# Altium PCB GenRF_R00.PcbDoc
Units mil, origin at the board's own origin, x right, y up, seen from the top; angles counter-clockwise.
Board outline 2755.91 x 1771.65 mil, 2 copper layers (Top Layer, Bottom Layer); 48 components, 33 nets, 152 pads, 297 vias.
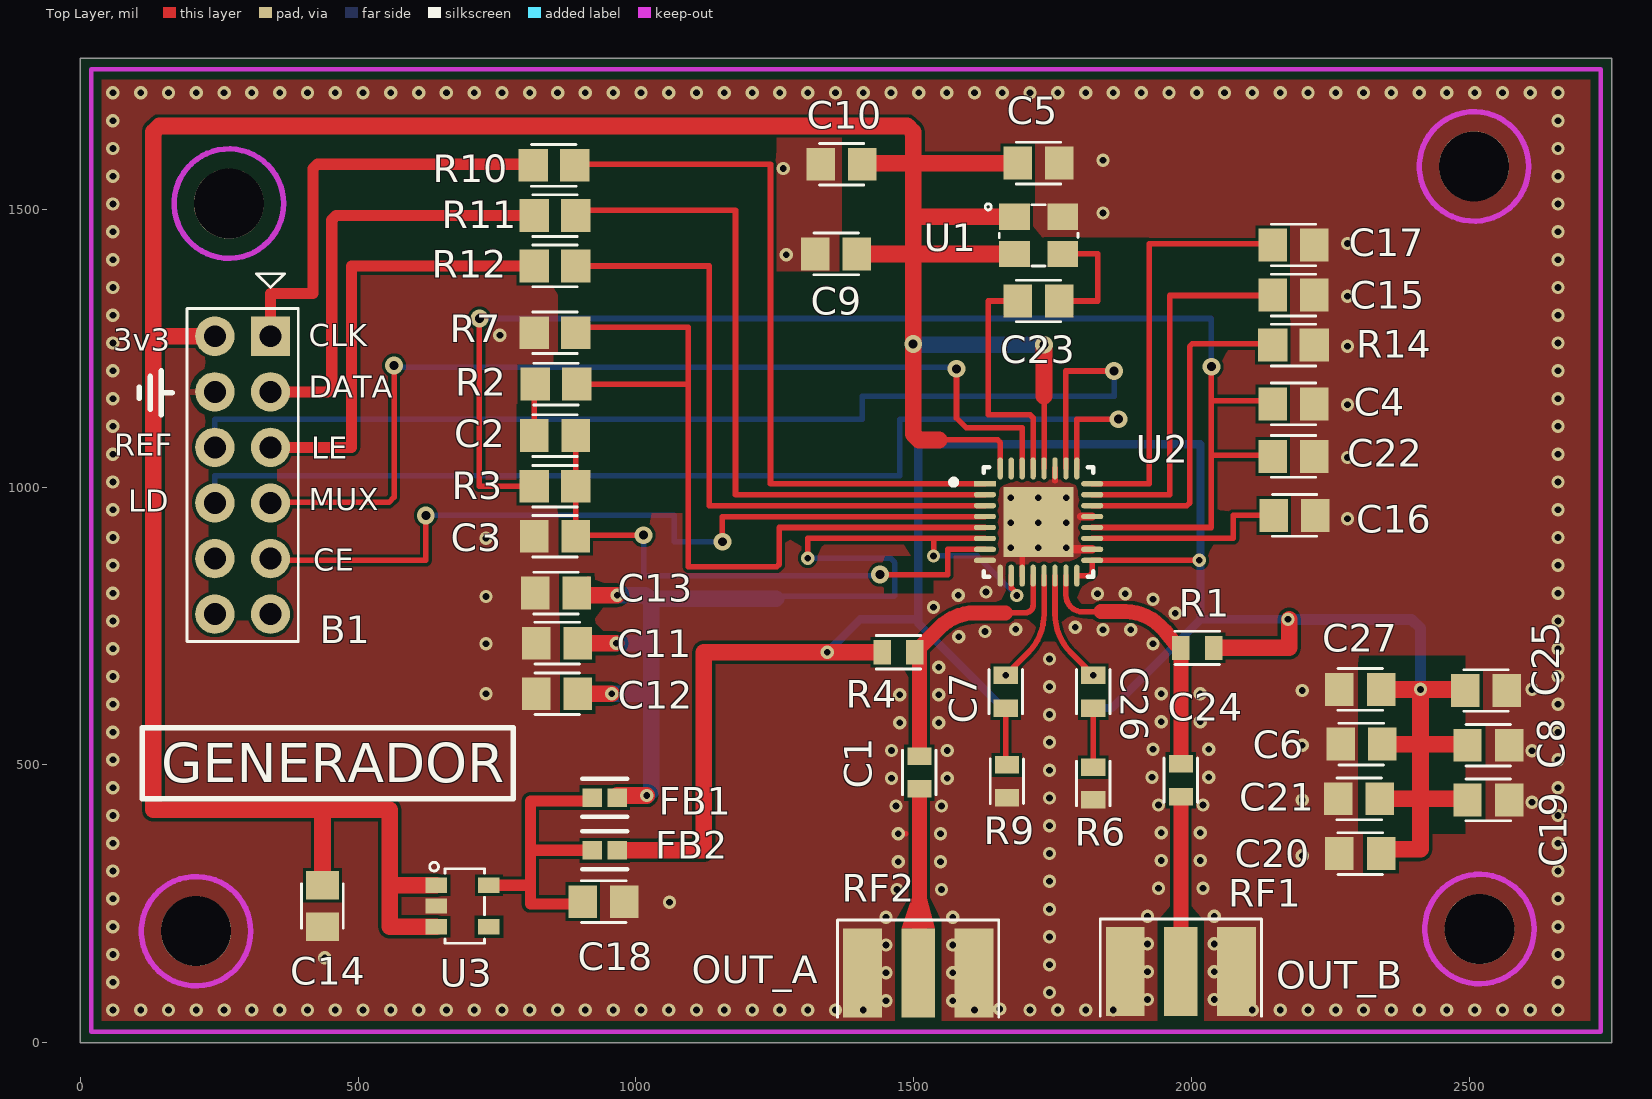
[diagram p0: Top Layer view]
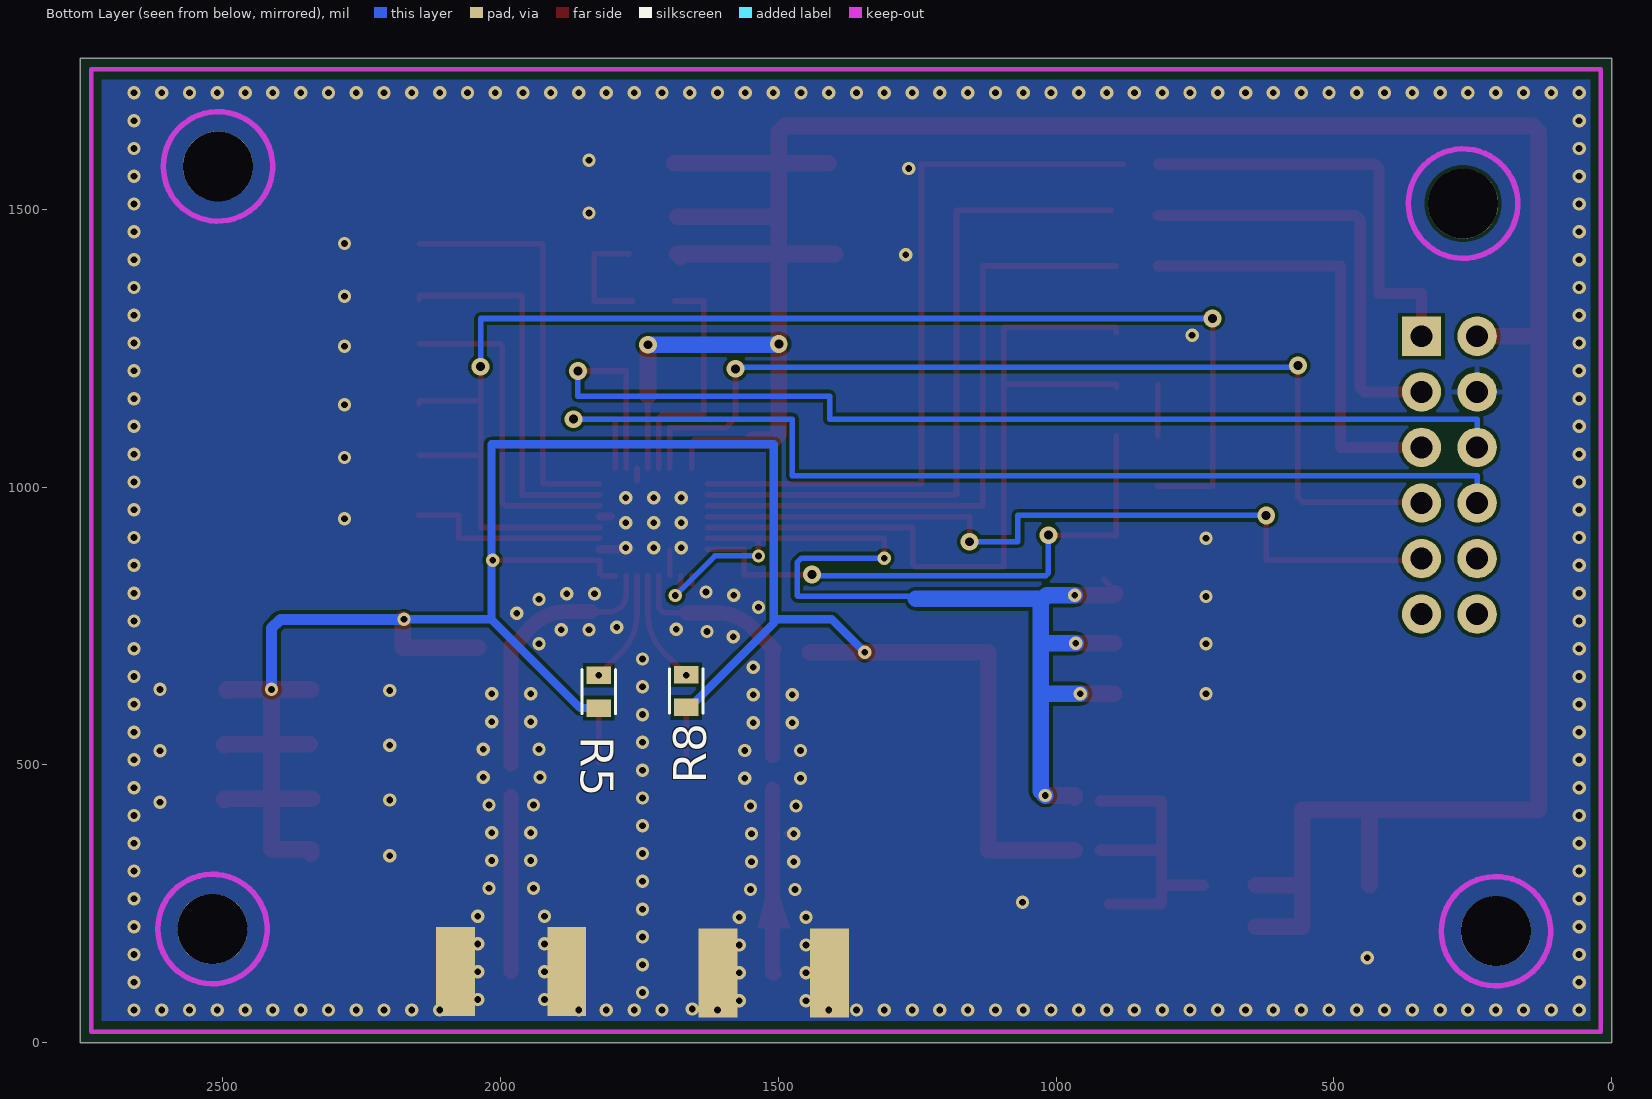
[diagram p1: Bottom Layer view, seen from below]
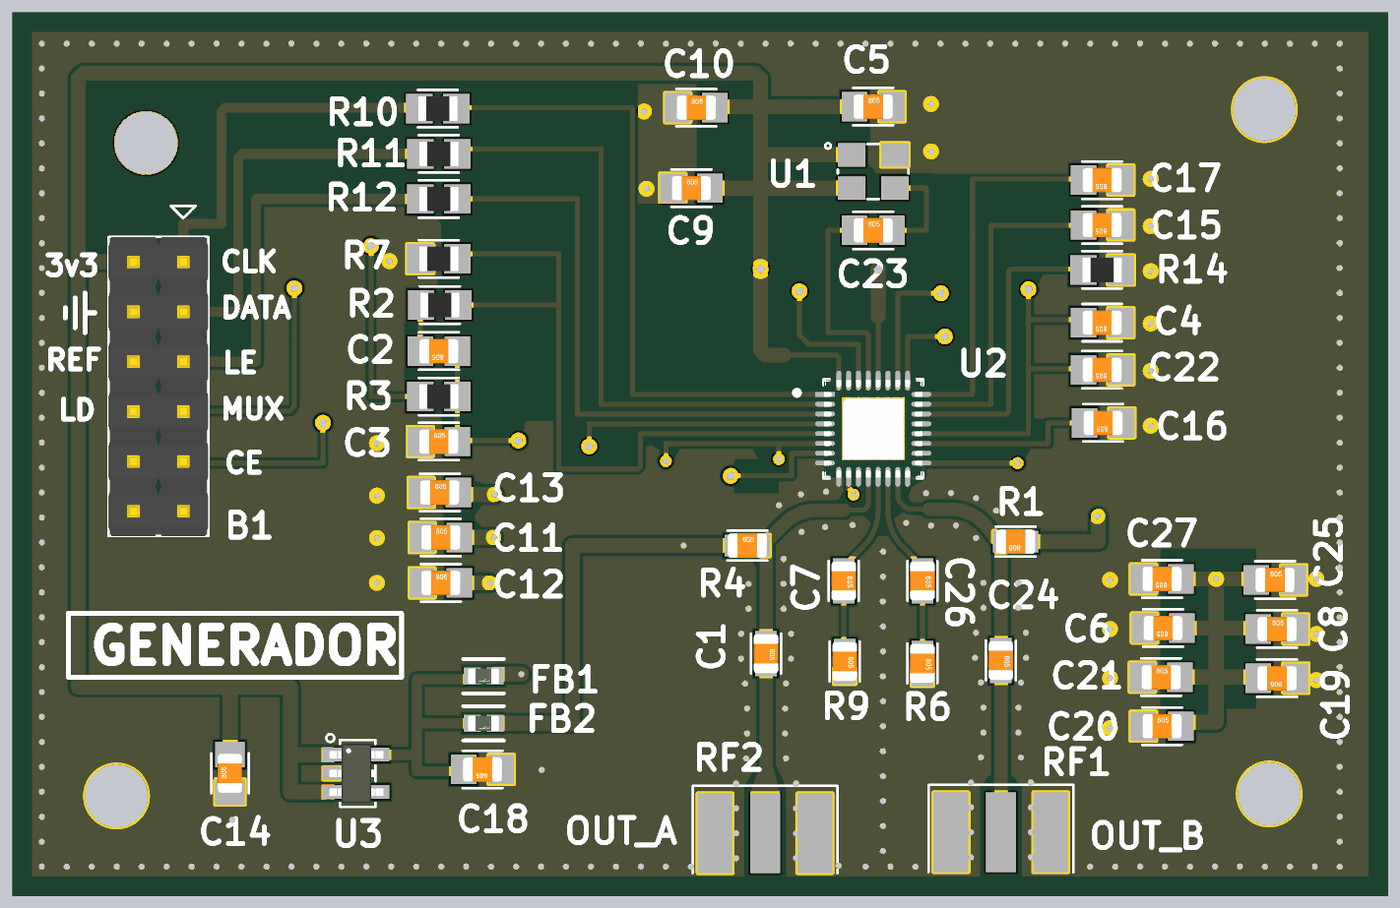
[diagram p2: 3D render of the assembled board from above, using the file's embedded part models]

## Layer stack, top to bottom
Top Solder: solder mask 0.4, Solder Resist, Dk 3.5
Top Layer: signal copper 1.4
Dielectric 1: dielectric 12.6, FR-4, Dk 4.8
Bottom Layer: signal copper 1.4
Bottom Solder: solder mask 0.4, Solder Resist, Dk 3.5

## Board outline
0,0 0,1771.65 2755.91,1771.65 2755.91,0

## Design rules (kind name [scope] priority, off if disabled: settings)
Clearance Clearance_3 [(HasFootprint('SMA_Connector') AND  Not InNet('GND'))] p1: gap=12 ignorepadtopadclearanceinfootprint=FALSE
Clearance Clearance_1 [All] p2: gap=6 ignorepadtopadclearanceinfootprint=TRUE
Clearance Clearance_1 [OnMid vs OnMid] p3: gap=6 ignorepadtopadclearanceinfootprint=FALSE sourcerule=41 cellrowname=All cellrowtype=0 cellcolname=All cellcoltype=0 innerlayers=TRUE
Clearance Clearance_2 [(ExistsOnLayer('Top Layer') Or ExistsOnLayer('Bottom Layer')) vs (ExistsOnLayer('Top Layer') Or ExistsOnLayer('Bottom Layer'))] p4: gap=6 ignorepadtopadclearanceinfootprint=FALSE sourcerule=41 cellrowname=All cellrowtype=0 cellcolname=All cellcoltype=0 outerlayers=TRUE
Clearance [All] p5: gap=10 ignorepadtopadclearanceinfootprint=FALSE ismatrix=TRUE
PolygonConnect [All] p1: thpad.connectstyle=Relief thpad.reliefconductorwidth=10 thpad.reliefentries=4 thpad.polygonreliefangle="90 Angle" thpad.airgapwidth=10 smdpad.connectstyle=Direct smdpad.reliefconductorwidth=10 smdpad.reliefentries=4 smdpad.polygonreliefangle="90 Angle" smdpad.airgapwidth=10 via.connectstyle=Direct via.reliefconductorwidth=10 via.reliefentries=4 via.polygonreliefangle="90 Angle" via.airgapwidth=10
RoutingVias RoutingViaStyle_1 [All] p1: holewidth=16 width=32 viastyle="Through Hole" minholewidth=12 minwidth=24 maxholewidth=24 maxwidth=50
RoutingVias [All] p2: holewidth=28 width=50 viastyle="Through Hole" minholewidth=28 minwidth=50 maxholewidth=28 maxwidth=50
ShortCircuit [All] p1: allowed=TRUE
SolderMaskExpansion [All] p1: expansion=4 istentingtop=FALSE
SupplyNets "Schematic Supply Nets" [InNet('GND')] p1: voltage=0.000
UnpouredPolygon ModifiedPolygon_1 [All] p1:
UnpouredPolygon [All] p2:
Width My_width [All] p1: maxlimit=100 minlimit=6 preferedwidth=10
28 further rules are at their usual default settings.

## Components (designator, comment, footprint, x,y, rotation, side; value= is the part's Value field where it differs from the comment)
B1 "Tira de pines de 12" "Header_M_2x6_0.1\"" 342.52,1271.26 r270 top
C1 "Capacitor" C_0603 1509.84,486.22 r270 top value=100pF
C2 "Capacitor" C_0805 854.33,1092.52 r180 top value=100nF
C3 "Capacitor" C_0805 854.33,911.42 r0 top value=12nF
C4 "Capacitor" C_0805 2183.07,1149.61 r180 top value=680pF
C5 "Capacitor" C_0805 1724.41,1582.68 r0 top value=0.01uF
C6 "Capacitor" C_0805 2305.12,537.4 r180 top value=100pF
C7 "Capacitor" C_0603 1665.35,631.89 r270 top value=100pF
C8 "Capacitor" C_0805 2533.46,535.43 r0 top value=100pF
C9 "Capacitor" C_0805 1360.24,1419.29 r0 top value=100nF
C10 "Capacitor" C_0805 1370.08,1580.71 r0 top value=100nF
C11 "Capacitor" C_0805 858.27,719.05 r0 top value=100nF
C12 "Capacitor" C_0805 858.27,627.95 r0 top value=100nF
C13 "Capacitor" C_0805 856.3,809.06 r0 top value=100pF
C14 "Capacitor" C_0805 436.07,246.06 r90 top value=1uF
C15 "Capacitor" C_0805 2183.07,1345.37 r180 top value=1uF
C16 "Capacitor" C_0805 2185.04,948.82 r180 top value=1uF
C17 "Capacitor" C_0805 2183.07,1435.38 r180 top value=1uF
C18 "Capacitor" C_0805 941.97,253.94 r180 top value=1uF
C19 "Capacitor" C_0805 2533.46,437.01 r180 top value=100nF
C20 "Capacitor" C_0805 2303.15,340.55 r0 top value=100nF
C21 "Capacitor" C_0805 2301.18,438.98 r0 top value=100pF
C22 "Capacitor" C_0805 2183.07,1055.12 r180 top value=150pF
C23 "Capacitor" C_0805 1724.41,1334.65 r0 top value=10nF
C24 "Capacitor" C_0603 1980.32,472.44 r270 top value=100pF
C25 "Capacitor" C_0805 2529.53,633.86 r0 top value=100pF
C26 "Capacitor" C_0603 1822.83,631.89 r270 top value=100pF
C27 "Capacitor" C_0805 2303.15,635.83 r180 top value=100pF
FB1 "BLM18PG181SN1D" FB_0603 943.94,440.94 r0 top
FB2 "BLM18PG181SN1D" FB_0603 943.94,346.46 r0 top
R1 "Resistor" R_0603 2009.84,710.63 r180 top value=49R9
R2 "Resistor" R_0805 856.3,1185.04 r180 top value=30R
R3 "Resistor" R_0805 854.33,1001.43 r0 top value=240R
R4 "Resistor" R_0603 1472.44,702.76 r0 top value=49R9
R5 "Resistor" R_0603 1822.83,631.89 r270 bottom value=49R9
R6 "Resistor" R_0603 1822.83,466.54 r270 top value=49R9
R7 "Resistor" R_0805 854.33,1277.56 r180 top value=90R
R8 "Resistor" R_0603 1665.32,632.95 r90 bottom value=49R9
R9 "Resistor" R_0603 1667.32,470.47 r270 top value=49R9
R10 "Resistor" R_0805 852.36,1578.74 r0 top value=120R
R11 "Resistor" R_0805 854.33,1488.19 r0 top value=120R
R12 "Resistor" R_0805 854.33,1397.64 r0 top value=120R
R14 "Resistor" R_0805 2183.07,1255.36 r180 top value=5K1
RF1 "SMA_Connector" SMA_Connector 1980.32,127.95 r180 top
RF2 "SMA_Connector" SMA_Connector 1507.87,125.98 r180 top
U1 "7X-19.200MBA-T" XTAL 1724.41,1452.76 r0 top
U2 "MAX2871ETJ+" MAX2870ETJ+ 1724.41,936.96 r0 top
U3 "LP5907QMFX-3.3" TSOP 688.03,246.06 r90 top

## Footprints (in the part's own frame and the unit in brackets; to place one, negate y for a bottom-side part, rotate by r counter-clockwise, add the part's x,y. Pads: shape width x height; smd on the part's side, far side on the other; paste and mask are expansions set on the pad)
C_0603 [mm] "Chip Capacitor, 2-Leads,"
  rect 0.8x1.1 smd: 1(-0.75,0) 2(0.75,0)
  silkscreen extent -1.02,-0.76 1.02,0.76, body extent -1,-0.62 1,0.63, height 0.78
C_0805 [mm] "Chip Capacitor, 2-Leads, Body 2.00x1.25mm"
  rect 1.3x1.5 smd: 1(-0.95,0) 2(0.95,0)
  silkscreen extent -1.02,-0.95 1.02,0.95, body extent -1,-0.62 1,0.63, height 0.78
FB_0603 [mm]
  rect 0.88x0.86 smd paste+0 mask+0.05: 1(-0.576,0) 2(0.576,0)
  silkscreen extent -1.03,-0.87 1.03,0.87, body extent -1.13,-0.58 1.13,0.58, height 0.25
"Header_M_2x6_0.1\"" [mm] "Header Male 2 x 6 Vias Pitch 100mils"
  rect 1.8x1.8 hole 1: 1(0,0)
  round 1.8 hole 1: 2(0,-2.54) 3(2.54,0) 4(2.54,-2.54) 5(5.08,0) 6(5.08,-2.54) 7(7.62,0) 8(7.62,-2.54) 9(10.16,0) 10(10.16,-2.54) 11(12.7,0) 12(12.7,-2.54)
  silkscreen extent -2.86,-3.81 13.95,1.27, body extent -1.27,-3.81 13.97,1.27, height 5.59
MAX2870ETJ+ [mm]
  rect 1.01x0.242 smd paste+0 mask+0: 1(-2.451,1.75)
  rrect100% 1.01x0.242 smd paste+0 mask+0: 2(-2.451,1.25) 3(-2.451,0.75) 4(-2.451,0.25) 5(-2.451,-0.25) 6(-2.451,-0.75) 7(-2.451,-1.25) 8(-2.451,-1.75) 17(2.451,-1.75) 18(2.451,-1.25) 19(2.451,-0.75) 20(2.451,-0.25) 21(2.451,0.25) 22(2.451,0.75) 23(2.451,1.25) 24(2.451,1.75)
  rrect100% 0.242x1.01 smd paste+0 mask+0: 9(-1.75,-2.451) 10(-1.25,-2.451) 11(-0.75,-2.451) 12(-0.25,-2.451) 13(0.25,-2.451) 14(0.75,-2.451) 15(1.25,-2.451) 16(1.75,-2.451) 25(1.75,2.451) 26(1.25,2.451) 27(0.75,2.451) 28(0.25,2.451) 29(-0.25,2.451) 30(-0.75,2.451) 31(-1.25,2.451) 32(-1.75,2.451)
  rect 3.2x3.2 smd paste-1000 mask+0: 33(0,0)
  silkscreen extent -4.01,-2.5 2.5,2.5, body extent -3.46,-3.46 3.46,3.46, height 0.25
R_0603 [mm] "Chip Capacitor, 2-Leads,"
  rect 0.8x1.1 smd: 1(-0.75,0) 2(0.75,0)
  silkscreen extent -1.02,-0.76 1.02,0.76, body extent -1,-0.62 1,0.63, height 0.78
R_0805 [mm] "Chip Resistor, 2-Leads, Body 2.00x1.25mm, IPC Low Density"
  rect 1.35x1.5 smd: 1(-0.95,0) 2(0.95,0)
  silkscreen extent -1.02,-0.95 1.02,0.95, body extent -1,-0.62 1,0.62, height 0.6
SMA_Connector [mil] "SMA PCB Connector 1.6mm / PN: EMPCB.CSMAFSTJ.A"
  rect 60x160 smd: 1(0,0)
  rect 70x160 smd: 2(-100,0) 2(100,0)
  rect 70x160 smd far side: 2(-100,0) 2(100,0)
  silkscreen extent -145,-95 145,80, body extent -121,-60 121,80, height 10
TSOP [mm]
  rect 0.7x1 smd mask+0.06: 1(0.95,1.2) 2(0,1.2) 3(-0.95,1.2)
  rect 0.7x1 smd: 4(-0.95,-1.2) 5(0.95,-1.2)
  silkscreen extent -1.7,-1 2,1.5, body extent -1.5,-1.41 1.5,1.34, height 1.1
XTAL [mm] "XTAL OSC XO 19.2000MHZ CMOS SMD"
  rect 1.4x1.2 smd: 1(-1.1,0.85) 2(1.1,0.85) 3(1.1,-0.85) 4(-1.1,-0.85)
  silkscreen extent -2.44,-1.4 1.8,1.44

## Part data
B1: library part "Headpin 10"
FB1 FB2: library part "Ferrite Bead"
RF1 RF2: "Connector SMA"
U1: "XTAL OSC XO 19.2000MHZ CMOS SMD"
U3: "IC REG LINEAR 3.3V 250MA SOT23-5"
C1 C2 C3 C4 C5 C6 C7 C8 C9 C10 C11 C12 C13 C14 C15 C16 C17 C18 C19 C20 C21 C22 C23 C24 C25 C26 C27: SimulationGenericComponent=True
R1 R2 R3 R4 R5 R6 R7 R8 R9 R10 R11 R12 R14: SimulationGenericComponent=True, TC1=0, TC2=0

## Free pads (board coordinates)
  round 125.98 hole 125.98: 2(208.66,200.79) 2(267.72,1509.84) 2(2507.87,1576.77) 2(2517.72,204.72)

## Via types
v1: diameter 24, hole 12, Top Layer to Bottom Layer, tented both sides, 254 vias
v2: diameter 24, hole 12, Top Layer to Bottom Layer, 30 vias
v3: diameter 32, hole 16, Top Layer to Bottom Layer, 11 vias
v4: diameter 24.02, hole 12, Top Layer to Bottom Layer, 1 vias
v5: diameter 32, hole 16, Top Layer to Bottom Layer, tented both sides, 1 vias

## Nets (pads, with @x,y where several pads share a name; then routed paths per layer and width w, separated by ;. In a path a pad name is that pad's centre, name@x,y a point inside that pad or via, vN(x,y) a via of type N, cw(c..) or ccw(c..) an arc to the next point about the centre after c; other vN are vias at no path point)
3V3: B1.2 C5.1 C9.2 C10.2 C14.2 U1.1 U1.4 U2.28 U2.32 U3.1 U3.3 | length 5599.8
  Top Layer w10: U3.1@640.79,281.5 U3.1 ; 1545.28,1084.65 1650.83,1084.65 1655.51,1079.96 U2.32 ; U2.28 1734.25,1163.39
  Top Layer w30: B1.2 131.89,1271.26 ; C14.2 436.07,419.29 ; U3.3 557.09,208.66 557.09,283.46 ; U3.1 557.09,283.46 ; C9.2 1498.84,1419.29 ; C10.2@1409.45,1582.68 1498.84,1582.68 ; 1507.87,1582.68 C5.1 ; 1545.28,1084.65 1509.38,1084.65 1498.84,1095.19 1498.84,1419.29 ; U1.4@1675.2,1413.39 U1.4 1498.84,1419.29 ; U1.1 1498.84,1486.22 ; 1734.25,1163.39 v5(1734.25,1255.91) ; 131.89,1271.26 131.89,1639.06 142.43,1649.61 1488.29,1649.61 1498.84,1639.06 1498.84,1582.68 ; 131.89,1271.26 131.89,419.29 436.07,419.29 ; 436.07,419.29 557.09,419.29 557.09,283.46 ; 1498.84,1419.29 1498.84,1486.22 ; 1498.84,1486.22 1498.84,1582.68
  Bottom Layer w30: v3@1500,1255.91 v5(1734.25,1255.91)
  other v3: 1498.84,1257.24
CP_OUT: C2.1 C3.2 R3.2 U2.7 | length 1030.6
  Top Layer w10: C3.2 C3.2@891.73,913.39 ; C2.1 R3.2 C3.2@891.73,913.39 ; v3(1013.78,913.39) C3.2@891.73,913.39 ; v3(1438.98,842.52) 1561.02,842.52 1561.02,887.75 U2.7
  Bottom Layer w10: v3(1013.78,913.39) 1013.78,845.24 1018.47,840.55 v3@1437.01,840.55
GND: B1.4 C3.1 C4.1 C5.2 C6.2 C8.2 C9.1 C10.1 C11.1 C12.1 C13.1 C14.1 C15.1 C16.1 C17.1 C18.1 C19.1 C20.1 C21.1 C22.1 C25.2 C27.2 pad.2@208.66,200.79 pad.2@2507.87,1576.77 pad.2@2517.72,204.72 R6.2 R7.2 R9.2 R14.1 RF1.2 RF2.2 U1.2 U2.8 U2.9 U2.11 U2.18 U2.21 U2.27 U2.33 U3.2 | length 167.6
  Top Layer w10: v1@1474.84,375.98 1485.34,375.98 ; U2.9@1655.51,826.15 U2.9 ; U2.11 U2.33@1694.88,885.83 ; 1753.94,1010.95 U2.27
  Top Layer w15: U2.33@1765.75,887.75 U2.18 ; U2.21@1801.2,946.8 U2.21
  other v1: 59.06,59.06 109.06,59.06 159.06,59.06 209.06,59.06 259.06,59.06 309.06,59.06 359.06,59.06 409.06,59.06 459.06,59.06 509.06,59.06 559.06,59.06 609.06,59.06 659.06,59.06 709.06,59.06 759.06,59.06 809.06,59.06 859.06,59.06 909.06,59.06 959.06,59.06 1009.06,59.06 1059.06,59.06 1109.06,59.06 1159.06,59.06 1209.06,59.06 1259.06,59.06 1309.06,59.06 1359.06,59.06 1409.06,59.06 1609.06,59.06 1709.06,59.06 1759.06,59.06 1809.06,59.06 1859.06,59.06 2109.06,59.06 2159.06,59.06 2209.06,59.06 2259.06,59.06 2309.06,59.06 2359.06,59.06 2409.06,59.06 2459.06,59.06 2509.06,59.06 2559.06,59.06 2609.06,59.06 2659.06,59.06 1654.84,60.98 1449.84,75.98 1569.84,75.98 1920.32,77.95 2040.32,77.95 1744.09,90.55 59.06,109.06 2659.06,109.06 1449.84,125.98 1569.84,125.98 1920.32,127.95 2040.32,127.95 1744.09,140.55 440.32,152.95 59.06,159.06 2659.06,159.06 1449.84,175.98 1569.84,175.98 1920.32,177.95 2040.32,177.95 1744.09,190.55 59.06,209.06 2659.06,209.06 1449.84,225.98 1569.84,225.98 1920.32,227.95 2040.32,227.95 1744.09,240.55 1060.32,252.95 59.06,259.06 2659.06,259.06 1469.84,275.98 1549.84,275.98 1940.32,277.95 2020.32,277.95 1744.09,290.55 59.06,309.06 2659.06,309.06 1471.84,325.98 1547.84,325.98 1945.32,327.95 2015.32,327.95 1744.09,340.55 59.06,359.06 2659.06,359.06 1471.84,375.98 1547.84,375.98 1945.32,377.95 2015.32,377.95 1744.09,390.55 59.06,409.06 2659.06,409.06 1467.87,425.98 1549.84,425.98 1940.32,427.95 2020.32,427.95 1744.09,440.55 59.06,459.06 2659.06,459.06 1459.84,475.98 1559.84,475.98 1928.35,477.95 2030.32,477.95 1744.09,490.55 59.06,509.06 2659.06,509.06 1459.84,525.98 1559.84,525.98 1930.32,527.95 2030.32,527.95 1744.09,540.55 59.06,559.06 2659.06,559.06 1474.84,575.98 1544.84,575.98 1945.32,577.95 2015.32,577.95 1744.09,590.55 59.06,609.06 2659.06,609.06 1474.84,625.98 1544.84,625.98 1945.32,627.95 2015.32,627.95 1744.09,640.55 59.06,659.06 2659.06,659.06 1544.84,675.98 1744.09,690.55 59.06,709.06 2659.06,709.06 1930.32,717.95 1580.71,730.31 1627.95,740.16 1840.32,742.95 1890.32,742.95 1683.07,744.09 1790.32,747.95 59.06,759.06 2659.06,759.06 1970.32,772.95 1535.43,783.46 1930.32,797.95 1579.84,805.12 1830.32,807.95 1880.32,807.95 59.06,809.06 2659.06,809.06 1629.92,811.02 59.06,859.06 2659.06,859.06 1674.09,890.55 1724.09,890.55 1774.09,890.55 59.06,909.06 2659.06,909.06 1674.09,935.55 1724.09,935.55 1774.09,935.55 59.06,959.06 2659.06,959.06 1674.09,980.55 1724.09,980.55 1774.09,980.55 59.06,1009.06 2659.06,1009.06 59.06,1059.06 2659.06,1059.06 59.06,1109.06 2659.06,1109.06 59.06,1159.06 2659.06,1159.06 59.06,1209.06 2659.06,1209.06 59.06,1259.06 2659.06,1259.06 59.06,1309.06 2659.06,1309.06 59.06,1359.06 2659.06,1359.06 59.06,1409.06 2659.06,1409.06 59.06,1459.06 2659.06,1459.06 59.06,1509.06 2659.06,1509.06 59.06,1559.06 2659.06,1559.06 59.06,1609.06 2659.06,1609.06 59.06,1659.06 2659.06,1659.06 59.06,1709.06 109.06,1709.06 159.06,1709.06 209.06,1709.06 259.06,1709.06 309.06,1709.06 359.06,1709.06 409.06,1709.06 459.06,1709.06 509.06,1709.06 559.06,1709.06 609.06,1709.06 659.06,1709.06 709.06,1709.06 759.06,1709.06 809.06,1709.06 859.06,1709.06 909.06,1709.06 959.06,1709.06 1009.06,1709.06 1059.06,1709.06 1109.06,1709.06 1159.06,1709.06 1209.06,1709.06 1259.06,1709.06 1309.06,1709.06 1359.06,1709.06 1409.06,1709.06 1459.06,1709.06 1509.06,1709.06 1559.06,1709.06 1609.06,1709.06 1659.06,1709.06 1709.06,1709.06 1759.06,1709.06 1809.06,1709.06 1859.06,1709.06 1909.06,1709.06 1959.06,1709.06 2009.06,1709.06 2059.06,1709.06 2109.06,1709.06 2159.06,1709.06 2209.06,1709.06 2259.06,1709.06 2309.06,1709.06 2359.06,1709.06 2409.06,1709.06 2459.06,1709.06 2509.06,1709.06 2559.06,1709.06 2609.06,1709.06 2659.06,1709.06
  other v2: 2198.82,336.61 2612.2,433.07 2198.82,437.01 2612.2,525.59 2198.82,535.43 730.32,627.95 2612.2,635.83 730.32,717.95 730.32,802.95 730.32,907.95 2280.32,942.95 2280.32,1052.95 2280.32,1147.95 2280.32,1252.95 755.32,1272.95 2280.32,1342.95 1270.32,1417.95 2280.32,1437.95 1840.32,1492.95 1265.32,1572.95 1840.32,1587.95
  other v4: 2198.82,633.86
LD: B1.8 U2.25 | length 1940.5
  Top Layer w10: U2.25 1793.31,1122.05 v3(1868.11,1122.05)
  Bottom Layer w10: B1.8 242.52,1019.92 1474.41,1019.92 1474.41,1122.05 v3(1868.11,1122.05) v3@1868.11,1122.83
MUX: B1.7 U2.30 | length 1765.4
  Top Layer w10: B1.7 342.52,972.44 555.75,972.44 564.96,981.65 v3(564.96,1218.5) ; v3(1576.77,1212.6) 1576.77,1124.02 1594.49,1106.3 1694.88,1106.3 U2.30
  Bottom Layer w10: v3(564.96,1218.5) 567.91,1215.55 1573.82,1215.55 v3(1576.77,1212.6)
NetB1_1: B1.1 R10.1 | length 778
  Top Layer w20: B1.1 342.52,1348.03 419.29,1348.03 419.29,1573.09 426.91,1580.71 R10.1@815.54,1580.71
NetB1_3: B1.3 R11.1 | length 782.4
  Top Layer w20: B1.3 445.14,1171.26 452.76,1178.88 452.76,1480.57 460.37,1488.19 R11.1
NetB1_5: B1.5 R12.1 | length 800.8
  Top Layer w20: B1.5 488.19,1071.26 488.19,1397.64 R12.1
NetB1_9: B1.9 U2.4 | length 1463.7
  Top Layer w10: B1.9 342.52,868.11 622.05,868.11 v3(622.05,948.82) ; v3(1155.51,901.57) 1155.51,946.8 U2.4
  Bottom Layer w10: v3@622.05,950.79 v3(622.05,948.82) 1068.9,948.82 1068.9,901.57 v3(1155.51,901.57)
NetC1_2: C1.2 RF2.1 | length 332.7
  Top Layer w27: RF2.1 1509.84,125.98 C1.2
NetC2_2: C2.2 R2.2 | length 92.5
  Top Layer w10: C2.2 R2.2@816.93,1185.04
NetC7_2: C7.2 R9.1 | length 88.6
  Top Layer w10: R9.1@1665.35,513.78 C7.2
NetC15_2: C15.2 U2.23 | length 686.5
  Top Layer w10: U2.23 1960.63,986.17 1960.63,1344.49 C15.2@2145.67,1344.49 ; C15.2@2145.67,1336.61 C15.2@2145.67,1340.01
NetC16_2: C16.2 U2.19 | length 368.1
  Top Layer w10: U2.19 2074.8,907.43 2074.8,948.82 C16.2
NetC17_2: C17.2 U2.24 | length 756.3
  Top Layer w10: U2.24 1923.23,1005.86 1923.23,1437.35 C17.2@2145.67,1437.35
NetC18_2: C18.2 FB1.1 FB2.1 U3.5 | length 586.5
  Top Layer w10: C18.2@904.57,250 C18.2 ; FB1.1@921.26,435.04 FB1.1
  Top Layer w20: U3.5 810.08,283.46 ; C18.2@904.57,250 810.08,250 810.08,283.46 ; FB2.1 810.08,346.46 ; FB1.1@921.26,435.04 810.08,435.04 810.08,346.46 ; 810.08,283.46 810.08,346.46
NetC23_1: C23.1 U2.29 | length 432
  Top Layer w10: C23.1 1633.86,1334.65 1633.86,1129.92 1709.29,1129.92 1714.57,1124.65 U2.29
NetC24_2: C24.2 RF1.1 | length 315
  Top Layer w27: RF1.1 C24.2
NetC26_2: C26.2 R6.1 | length 98.4
  Top Layer w10: R6.1@1822.83,503.94 C26.2
NetR10_2: R10.2 U2.1 | length 1323.4
  Top Layer w10: R10.2@879.39,1580.71 1242.13,1580.71 1242.13,1005.86 U2.1
NetR11_2: R11.2 U2.2 | length 1238.6
  Top Layer w10: R11.2@901.13,1498.03 1179.13,1498.03 1179.13,986.17 U2.2
NetR12_2: R12.2 U2.3 | length 1167.3
  Top Layer w10: R12.2 1131.89,1397.64 1131.89,966.49 U2.3
NetR14_2: R14.2 U2.22 | length 610.1
  Top Layer w10: U2.22 1991.38,966.49 1996.06,971.17 1996.06,1252.65 2000.75,1257.33 R14.2@2145.67,1257.33
REF_EN: B1.6 U2.26 | length 2016.9
  Top Layer w10: U2.26 1773.62,1208.66 v3(1860.24,1208.66)
  Bottom Layer w10: B1.6 242.52,1122.05 1407.48,1122.05 1407.48,1163.39 1860.24,1163.39 v3(1860.24,1208.66)
REF_IN: C23.2 U1.3 | length 219.3
  Top Layer w8: U1.3 U1.3@1769.69,1417.32
  Top Layer w10: C23.2 1830.71,1334.65 1830.71,1419.29 U1.3
RFOUTA_N: C7.1 R8.2 U2.13 | length 203.3
  Top Layer w10: v1(1665.35,661.42) 1704.96,701.03 ccw(c1634.25,771.74) 1734.25,771.74 U2.13
RFOUTA_P: C1.1 R4.2 U2.12 | length 485.4
  Top Layer w10: 1665.41,773.68 1700.86,773.68 ccw(c1700.86,787.39) 1714.57,787.39 U2.12
  Top Layer w20: R4.2@1507.87,708.66 R4.2@1509.84,708.66
  Top Layer w27: R4.2@1507.87,708.66 1546.15,746.94 cw(c1610.57,682.51) 1610.57,773.62 1665.35,773.62 ; C1.1 R4.2@1509.84,708.66
RFOUTB_N: C24.1 R1.2 U2.15 | length 494.6
  Top Layer w10: U2.15 1773.62,805.21 ccw(c1803.24,805.21) 1803.24,775.59 1836.61,775.59
  Top Layer w20: 1944.82,748.09 1950.12,742.79 cw(c1940.96,733.57) 1950.2,742.72 1950.75,742.16 cw(c1939.27,732.55) 1950.93,741.95 ; R1.2@1973.13,714.41 R1.2@1980.32,714.41
  Top Layer w27: 1836.61,775.59 1881.13,775.59 cw(c1881.13,688.22) 1934.87,757.11 1944.82,748.09 ; 1950.93,741.95 R1.2@1973.13,714.41 ; C24.1 R1.2@1980.32,714.41
RFOUTB_P: C26.1 R5.1 U2.14 | length 203.3
  Top Layer w10: U2.14 1753.94,771.74 ccw(c1853.94,771.74) 1783.23,701.03 v1(1822.83,661.42)
SW: R2.1 R7.1 U2.5 | length 1453.8
  Top Layer w10: R2.1@891.73,1179.13 891.73,1185.04 1094.49,1185.04 ; R7.1 891.73,1287.4 1094.49,1287.4 1094.49,1185.04 ; U2.5 1257.87,927.12 1257.87,860.99 1253.19,856.3 1094.49,856.3 1094.49,1185.04
TUNE: C4.2 C22.2 R3.1 U2.20 | length 2532
  Top Layer w10: v3(718.5,1303.15) 718.5,1001.43 R3.1 ; U2.20 2035.43,927.12 2035.43,1057.09 ; v3(2035.43,1216.54) 2035.43,1155.51 ; C22.2@2145.67,1057.09 2035.43,1057.09 ; C4.2 C4.2@2145.67,1153.54 ; C4.2@2145.67,1155.51 2035.43,1155.51 ; 2035.43,1057.09 2035.43,1155.51
  Bottom Layer w10: v3(718.5,1303.15) 2035.43,1303.15 v3(2035.43,1216.54)
VCC_PLL: C11.2 C12.2 C13.2 FB1.2 U2.6 U2.10 | length 2117.1
  Top Layer w10: C13.2 893.7,812.99 C13.2@914.29,833.58 ; v2(1309.06,872.05) 1309.06,907.43 1535.43,907.43 ; v2(1535.43,875.98) 1535.43,907.43 ; U2.6 1535.43,907.43 ; U2.10 1675.42,840.23 1675.42,818.22 1685.04,808.6 v2(1685.04,804.81)
  Top Layer w30: C13.2 897.64,805.12 v2(966.54,805.12) ; C12.2 v2(956.69,627.95) ; C11.2 v2(964.57,719.05) ; FB1.2 966.62,444.88 v1(1019.69,444.88)
  Bottom Layer w10: 1251.97,799.21 1255.91,803.15 1464.57,803.15 1465.98,804.56 1465.98,863.98 1457.91,872.05 v2(1309.06,872.05) ; v2(1535.43,875.98) 1613.87,875.98 v2(1685.04,804.81)
  Bottom Layer w30: v2(956.69,627.95) 1025.59,627.95 1027.56,625.98 ; v2(964.57,719.05) 1027.02,719.05 1027.56,718.5 ; v2(966.54,805.12) 1017.01,805.12 1022.92,799.21 ; v1(1019.69,444.88) 1027.56,452.76 1027.56,625.98 ; 1251.97,799.21 1022.92,799.21 ; 1022.92,799.21 1027.56,794.57 1027.56,718.5 ; 1027.56,625.98 1027.56,718.5
VCC_RF: C6.1 C8.1 C19.2 C20.2 C21.2 C25.1 C27.1 FB2.2 R1.1 R4.1 R5.2 R8.1 U2.16 U2.17 | length 4423.7
  Top Layer w10: U2.16 1816.23,840.45 1820.92,845.14 U2.17 v2(2013.78,868.06)
  Top Layer w30: FB2.2 1122.05,346.46 1122.05,702.76 v1(1344.49,702.76) R4.1 ; R1.1 2175.2,710.63 v2@2175.2,761.81 ; C21.2 2411.42,438.98 ; C20.2 2340.55,348.43 2411.42,348.43 2411.42,438.98 ; C27.1 v2(2411.42,635.83) ; C6.1 2411.42,537.4 ; C25.1 2492.13,635.83 v2(2411.42,635.83) ; C19.2 2496.06,438.98 2411.42,438.98 ; C8.1 2496.06,537.4 2411.42,537.4 ; 2411.42,438.98 2411.42,537.4 ; 2411.42,537.4 v2(2411.42,635.83)
  Bottom Layer w15: v1(1344.49,702.76) 1403.54,761.81 1507.87,761.81 ; R8.1 1659.41,603.43 1507.87,754.96 1507.87,761.81 ; R5.2 1856.3,602.36 2015.75,761.81 ; v2(2173.23,761.81) 2015.75,761.81 ; 1507.87,761.81 1507.87,1076.77 2015.75,1076.77 2015.75,868.06 2015.75,761.81
  Bottom Layer w20: v2(2173.23,761.81) 2395.67,761.81 2411.42,746.06 v2(2411.42,635.83)
pads on no net: B1.10 B1.11 B1.12 U2.31 U3.4

## Polygon pours and split planes (outlines as drawn)
GND on Top Layer "gnd" (solid, remove dead copper, pour order 0): 39.37,1732.28 2716.54,1732.28 2716.54,39.37 39.37,39.37
GND on Bottom Layer "gnd" (solid, pour order 2): 39.37,39.37 39.37,1732.28 2716.54,1732.28 2716.54,39.37

## Keep-outs
Keep-Out Layer:
  circle w10: c267.72,1509.84 r98.43
  circle w10: c208.66,200.79 r98.43
  circle w10: c2517.72,204.72 r98.43
  circle w10: c2507.87,1576.77 r98.43
  lines w8: 19.68,19.68 19.68,1751.97 2736.22,1751.97 2736.22,19.68 19.68,19.68

## Other copper
Top Layer:
  pour cut-out: 1477.42,1096.46 1645.67,1096.46 1645.67,1301.18 1912.01,1301.18 1912.01,1015.75 1803.15,1015.75 1803.15,1062.99 1643.7,1062.99 1643.7,1017.72 1477.42,1017.72
  pour cut-out: 1250.32,1387.95 1480.32,1387.95 1480.32,1020.61 1476.78,1017.07 1253.34,1017.07 1253.34,1384.93
  pour cut-out: 1448.82,875.98 1535.43,875.98 1535.43,807.09 1534.8,807.72 1445.58,807.72 1445.58,870.78 1448.82,874.02
  pour cut-out: 1370.08,1659.45 1370.08,1431.1 1477.42,1431.1 1477.42,1659.45
  pour cut-out: 1253.34,1606.3 1253.34,1659.45 905.51,1659.45 905.51,1606.3
  pour cut-out: 1996.63,249.72 1996.63,219.95 2022.32,219.95 2009.84,234.25
  pour cut-out: 1964,249.72 1964,219.95 1938.32,219.95 1952.76,236.22
  pour cut-out: 1549.87,217.98 1541.24,217.98 1529.72,261.14 1541.24,238.19
  pour cut-out: 1465.87,217.98 1478.35,240.16 1489.96,261.27 1475.25,217.98
  pour cut-out: 784.35,1149.51 784.35,1036.95 879.92,1036.95 879.92,1149.51
  pour cut-out: 1520.25,1561.27 1718.5,1561.27 1718.5,1505.91 1520.25,1505.91 1520.25,1507.63
  pour cut-out: 1801.28,1448.91 1793.4,1448.91 1793.4,1301.18 1923.23,1301.18 1923.23,1448.82
  pour cut-out: 2301.18,696.85 2492.13,696.85 2492.13,375.98 2299.21,375.98 2299.21,681.1
  pour cut-out: 859.16,1313.09 859.16,1362.2 924.31,1362.2 924.31,1386.42 1120.67,1386.42 1120.67,1280.9 1102.96,1298.62 924.31,1298.62 924.31,1313.09
  pour cut-out: 851.47,1242.03 851.47,1210.63 925.2,1210.63 925.2,1242.03 924.31,1242.03
  pour cut-out: 924.31,1276.19 924.31,1196.25 1083.27,1196.25 1083.27,1276.19
  pour cut-out: 924.31,1173.82 1083.27,1173.82 1083.17,1173.72 1083.17,952.76 924.31,952.76

## Silkscreen, mask and mechanical layers (free items; w line width, h text height)
Top Overlay:
  lines w10: 106.3,1159.45 106.3,1179.13 ; 125.98,1139.76 125.98,1198.82 ; 145.67,1129.92 145.67,1208.66 ; 145.67,1169.29 165.35,1169.29 ; 112.2,438.98 779.53,438.98 779.53,566.93 112.2,566.93 112.2,438.98
  text "CLK" at 411.57,1253.16 h40
  text "3v3" at 59.21,1245.29 h40
  text "DATA" at 411.57,1160.64 h40
  text "REF" at 61.18,1056.31 h40
  text "LE" at 415.51,1050.41 h40
  text "MUX" at 411.57,957.89 h40
  text "LD" at 86.77,955.92 h40
  text "CE" at 419.45,849.62 h40
  text "GENERADOR" at 145.98,469.08 h70
  text "OUT_A" at 1100.55,107.34 h50
  text "OUT_B" at 2151.73,97.5 h50
Mechanical 1:
  the board outline again, w5

## Dimensions
2755.91,1771.65 to 2755.91,0 on Mechanical 10
0,0 to 2755.91,0 on Mechanical 10